# Altium PCB LKS_Motor_0313.PcbDoc
Units mil, origin at the board's own origin, x right, y up, seen from the top; angles counter-clockwise.
Board outline 4321.51 x 591.52 mil, 2 copper layers (Top Layer, Bottom Layer); 107 components, 74 nets, 326 pads, 0 vias.
Unrouted connection lines stored in the file: 165.
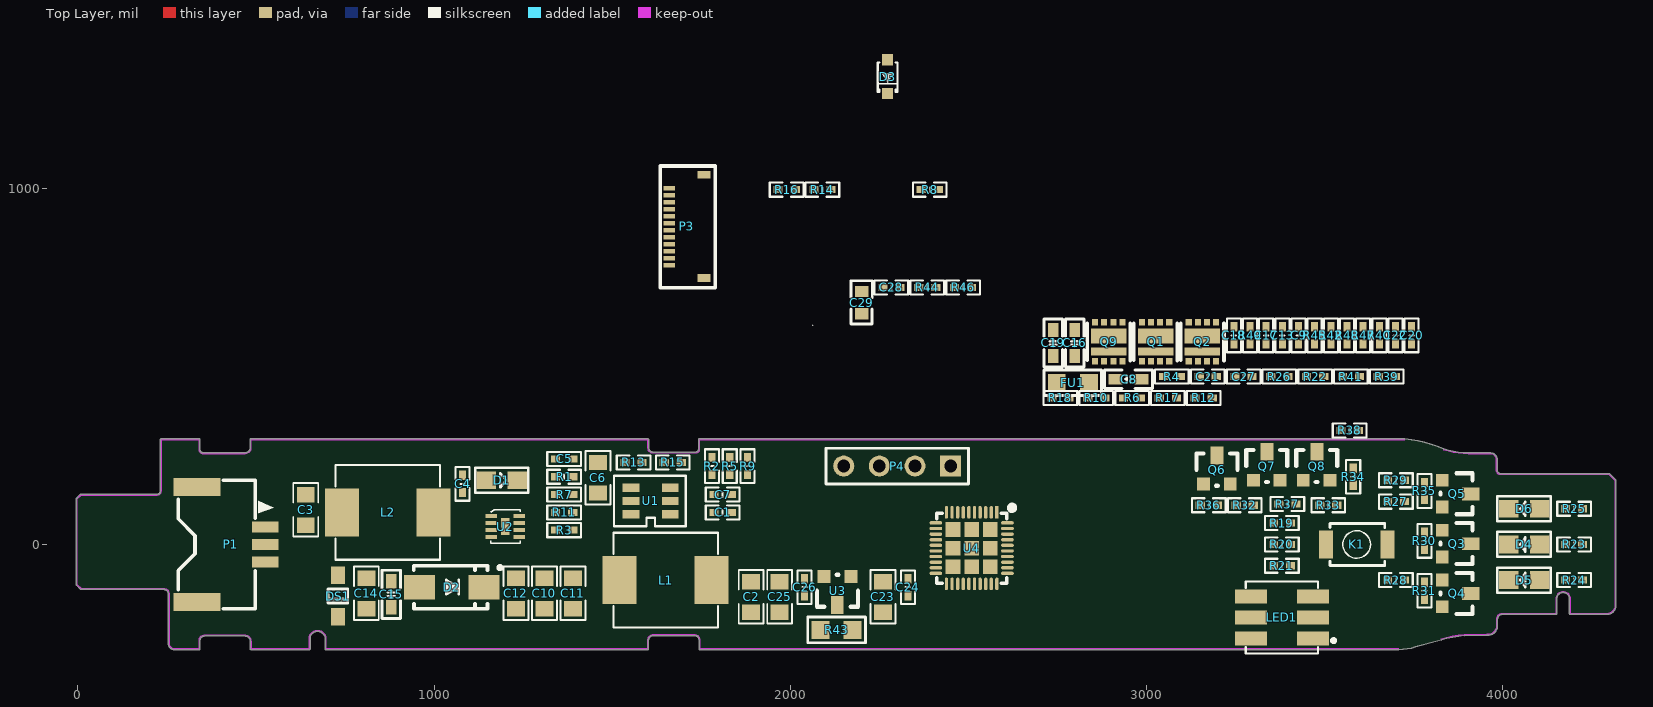
[diagram p0: Top Layer view]
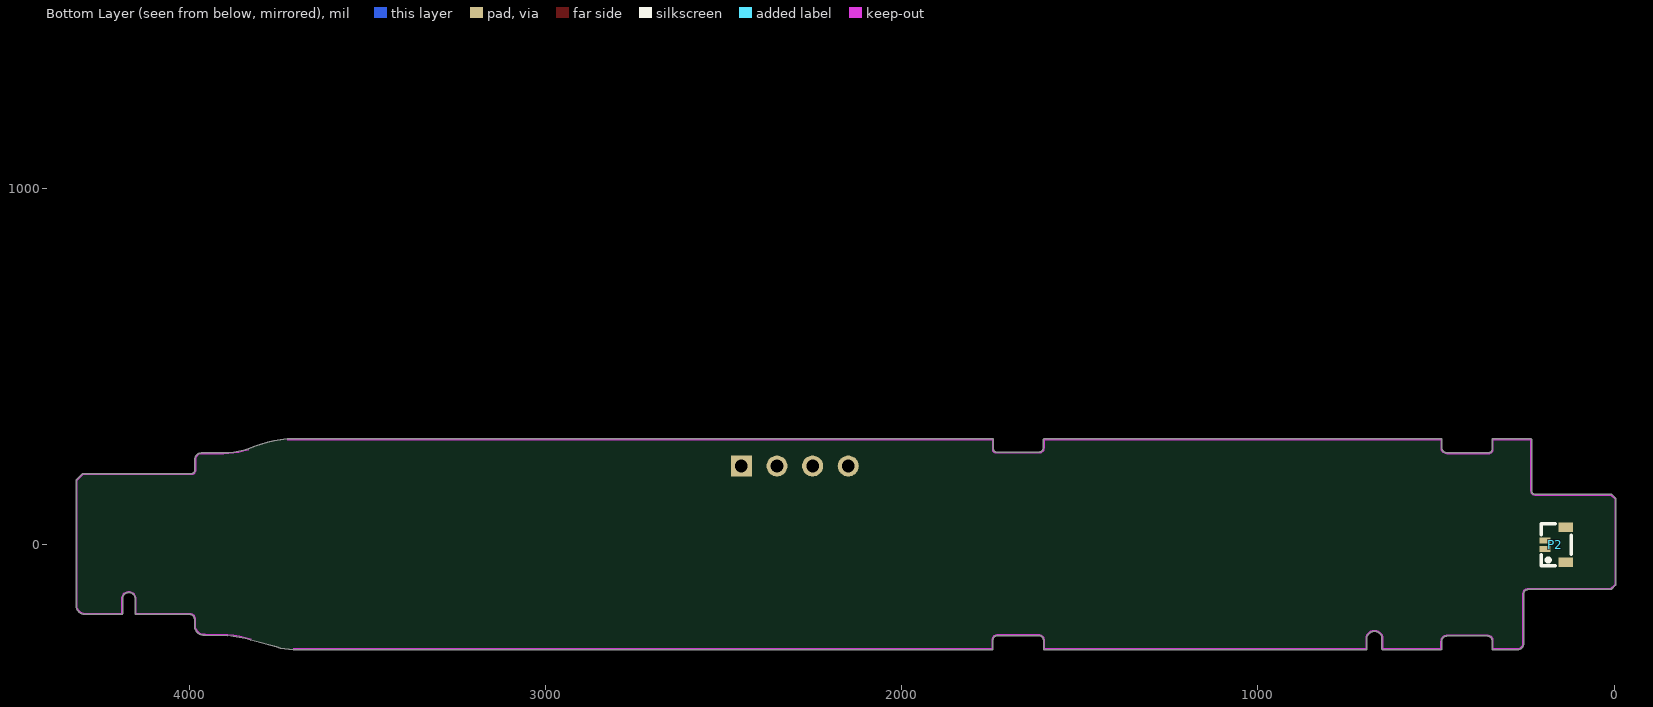
[diagram p1: Bottom Layer view, seen from below]

## Layer stack, top to bottom
Top Solder: solder mask 0.4, Solder Resist, Dk 3.5
Top Layer: signal copper 1.4
Dielectric1: core 12.6, FR-4, Dk 4.8
Bottom Layer: signal copper 1.4
Bottom Solder: solder mask 0.4, Solder Resist, Dk 3.5

## Board outline
340.79,-295.23 ccw(c340.79,-293.25) 342.78,-293.25 342.78,-270.05 cw(c355.82,-270.05) 355.82,-257.01 469.32,-257.01 cw(c469.32,-271.91) 484.23,-271.91 484.23,-293.25 ccw(c486.21,-293.25) 486.21,-295.23 649.96,-295.23 ccw(c649.96,-293.25) 651.94,-293.25 651.94,-259.1 cw(c672.98,-266.47) 694.02,-259.1 694.02,-293.25 ccw(c696,-293.25) 696,-295.23 1599.85,-295.23 ccw(c1599.85,-293.25) 1601.84,-293.25 1601.84,-269.29 cw(c1615.4,-269.32) 1615.37,-255.76 1730.9,-255.76 cw(c1730.9,-268.67) 1743.81,-268.67 1743.81,-293.3 ccw(c1745.79,-293.3) 1745.79,-295.29 3708.08,-295.29 ccw(c3708.08,-293.3) 3708.1,-295.29 ccw(c3706.34,-133.03) 3754.89,-287.86 3826.52,-268.29 ccw(c3826,-266.38) 3826.58,-268.27 cw(c3922.68,-590.85) 3892.14,-255.65 3955.05,-254.61 ccw(c3958.35,-227.78) 3985.04,-232.11 ccw(c3983.08,-231.79) 3985.06,-231.79 ccw(c3983.08,-231.79) 3985.06,-231.77 3985.06,-210.33 cw(c3999.33,-210.33) 3999.33,-196.07 4149.75,-196.07 ccw(c4149.75,-194.08) 4151.73,-194.08 4151.73,-148.89 cw(c4169.43,-153) 4187.14,-148.89 4187.14,-194.29 ccw(c4189.12,-194.29) 4189.12,-196.28 4293.89,-196.28 ccw(c4293.91,-194.29) 4294.1,-196.27 ccw(c4291.6,-169.92) 4317.01,-177.29 ccw(c4315.11,-176.74) 4317.09,-176.74 4317.09,180.13 ccw(c4315.11,180.13) 4316.5,181.55 4316.51,181.54 4300,198.05 4300.01,198.03 ccw(c4298.6,196.64) 4298.6,198.63 3994.41,198.63 cw(c3994.41,209.02) 3984.02,209.02 3984.02,238.48 ccw(c3965.86,238.48) 3965.86,256.65 3903.32,256.65 cw(c3910.73,520.73) 3833.14,268.19 ccw(c3692.04,-53.42) 3725.14,296.22 ccw(c3724.95,294.25) 3724.95,296.23 1744.96,296.23 ccw(c1744.96,294.25) 1742.97,294.25 1742.97,268.35 ccw(c1744.96,268.35) 1742.97,268.33 cw(c1733.77,268.35) 1733.79,259.15 cw(c1733.77,268.35) 1733.77,259.15 1614.77,259.15 cw(c1614.77,271.56) 1602.36,271.56 1602.36,294.14 ccw(c1600.38,294.14) 1600.38,296.13 485.79,296.13 ccw(c485.79,294.14) 483.81,294.14 483.81,271.08 cw(c469.79,271.08) 469.79,257.06 352.69,257.06 cw(c352.69,266.98) 342.78,266.98 342.78,294.25 ccw(c340.79,294.25) 340.79,296.23 233.92,296.23 ccw(c233.92,294.25) 231.94,294.25 231.94,150.5 cw(c221.84,150.5) 221.84,140.4 7.83,140.4 ccw(c7.83,138.41) 6.41,139.81 6.42,139.82 -3.84,129.56 -3.83,129.57 ccw(c-2.43,128.15) -4.42,128.15 -4.42,-112.73 ccw(c-2.43,-112.73) -3.84,-114.13 7.93,-125.9 ccw(c9.34,-124.5) 9.34,-126.48 241.97,-126.48 cw(c241.97,-138.74) 254.23,-138.74 254.23,-278.75 ccw(c270.72,-278.75) 270.72,-295.23

## Design rules (kind name [scope] priority, off if disabled: settings)
Clearance [(InPoly)] p1: gap=8 ignorepadtopadclearanceinfootprint=FALSE except(0: Arc-Hole Track-Hole SMDPad-Hole THPad-Hole Via-Hole Fill-Hole Poly-Hole Region-Hole Text-Hole)
ComponentClearance [All] p1 off: gap=10 collisioncheckmode=3 verticalgap=10 showdistances=FALSE
FabricationTestpoint [(IsPad And (OnTopLayer Or OnBottomLayer))] p1: side=3 testpointundercomponent=TRUE minsize=40 maxsize=100 preferedsize=60 minholesize=0 maxholesize=40 preferedholesize=32 testpointgrid=1 allowsidetop=TRUE allowsidebottom=TRUE usegrid=TRUE gridtolerance=0.01
HoleSize [All] p1: absolutevalues=TRUE maxlimit=200 minlimit=1 maxpercent=80.000 minpercent=20.000
HoleToHoleClearance [All] p1: gap=5 allowstackedmicrovias=TRUE
MinimumSolderMaskSliver [All] p1 off: minsoldermaskwidth=5
PlaneClearance [All] p1: clearance=7
PolygonConnect PolygonConnect_1 [IsPad] p1: connectstyle=Relief reliefconductorwidth=20 reliefentries=4 polygonreliefangle="90 Angle" airgapwidth=10
PolygonConnect [All] p2: connectstyle=Direct reliefconductorwidth=20 reliefentries=4 polygonreliefangle="90 Angle" airgapwidth=10
RoutingVias [All] p1: holewidth=18 width=30 viastyle="Through Hole" minholewidth=11.81 minwidth=19.68 maxholewidth=39.37 maxwidth=78.74
SilkToSilkClearance [All] p1 off: silktosilkclearance=5
SilkToSolderMaskClearance SilkscreenOverComponentPads [IsPad] p1 off: minsilkscreentomaskgap=5 clearancetoexposedcopper=TRUE
SolderMaskExpansion [All] p1: expansion=4 istentingtop=FALSE
Width [All] p1: maxlimit=100 minlimit=5 preferedwidth=8
22 further rules are at their usual default settings.

## Components (designator, comment, footprint, x,y, rotation, side; value= is the part's Value field where it differs from the comment)
C1 "1uF/16V" "C 0402_M" 1810,90 r180 top
C2 "10uF/16V" 0805C 1890,-150 r90 top
C3 "22uF/25V" 0805C 640,100 r270 top
C4 "1uF/25V" "C 0402_M" 1080,170 r90 top
C5 "103" "R 0402_M" 1365,240 r180 top
C6 "10uF/16V" 0805C 1460,190 r270 top
C7 "10pF/16V" "C 0402_M" 1810,140 r180 top
C8 "4.7uF/25V" "C 0603_M" 2949.5,464 r0 top
C9 "1nF" "C 0402_M" 3426.53,586.76 r90 top
C10 "22uF/25V" 0805C 1310,-140 r90 top
C11 "22uF/25V" 0805C 1390,-140 r90 top
C12 "22uF/25V" 0805C 1230,-140 r90 top
C13 "1nF" "C 0402_M" 3381.16,586.76 r90 top
C14 "22uF/25V" 0805C 810,-140 r90 top
C15 "1uF/25V" "C 0603_M" 880,-140 r90 top
C16 "4.7uF/25V" "C 0603_M" 2798,565.5 r90 top
C17 "1nF" "C 0402_M" 3335.79,586.76 r90 top
C18 "1nF" "C 0402_M" 3245.05,586.76 r90 top
C19 "4.7uF/25V" "C 0603_M" 2738,565.5 r90 top
C20 "1nF" "C 0402_M" 3744.12,586.76 r90 top
C21 "1nF" "C 0402_M" 3171.73,471.31 r0 top
C22 "NC" "C 0402_M" 3698.75,586.76 r90 top
C23 "10uF/10V" 0805C 2260,-150 r90 top
C24 "100nF" "C 0402_M" 2330,-120 r270 top
C25 "10uF/10V" 0805C 1970,-150 r90 top
C26 "100nF/10V" "C 0402_M" 2040,-120 r270 top
C27 "1nF/50V" "C 0402_M" 3272.22,471.31 r0 top
C28 "100nF/50V" "C 0402_M" 2283.93,721.31 r0 top
C29 "1uF/10V" 0603 2200.22,678.65 r90 top
D1 "LED_R" SMDLED 1190,180 r0 top
D2 "SS34" SMA 1050,-120 r0 top
D3 "4148" SOD-323 2273.07,1313.01 r90 top
D4 "LED_R" SMDLED 4060,0 r180 top
D5 "LED_R" SMDLED 4060,-100 r180 top
D6 "LED_R" SMDLED 4060,100 r180 top
DS1 "SMF12CA-MS" SOD-123F 730,-145 r90 top
FU1 "0.05R" "R 0805_M" 2793,454 r0 top
K1 "K1" Button3x4x2 3590,0 r180 top locked
L1 "6.8uH" 0630-10UH 1650,-100 r180 top
L2 "4.7uH" 0630-10UH 870,90 r0 top
LED1 "RGB5050" RGB-5050 3370,-210 r180 top
P1 "Header 3" X9827WRS-3P 430,5 r270 top locked
P2 "Header 2" CONN_SMD_2P_0.6 160,0 r90 bottom locked
P3 "Header 12" SMD-12 1660,1000 r270 top
P4 "Header 4" HDR1X4 2450,220 r180 top
Q1 "CJBM3020" DFN-3X3_8 2986.96,514.42 r0 top
Q2 "CJBM3020" DFN-3X3_8 3118.41,514.42 r0 top
Q3 "J3Y" SOT-23 3830,40 r270 top
Q4 "J3Y" SOT-23 3830,-100 r270 top
Q5 "J3Y" SOT-23 3830,180 r270 top
Q6 "J3Y" SOT-23 3160,170 r0 top
Q7 "J3Y" SOT-23 3300,180 r0 top
Q8 "J3Y" SOT-23 3440,180 r0 top
Q9 "CJBM3020" DFN-3X3_8 2855.5,514.42 r0 top
R1 "4.7K" "C 0402_M" 1365,190 r0 top
R2 "2.5M" "C 0402_M" 1780,220 r90 top
R3 "510" "R 0402_M" 1365,40 r0 top
R4 "10R" "R 0402_M" 3071.24,471.31 r0 top
R5 "340K" "C 0402_M" 1830,220 r90 top
R6 "10K" "R 0402_M" 2959.22,411.31 r0 top
R7 "RS/NC" "R 0402_M" 1365,140 r180 top
R8 "200K" "C 0402_M" 2391.66,995.77 r0 top
R9 "0" "C 0402_M" 1880,220 r90 top
R10 "10R" "R 0402_M" 2858.73,411.31 r0 top
R11 "RP/NC" "R 0402_M" 1365,90 r0 top
R12 "10K" "R 0402_M" 3160.2,411.31 r0 top
R13 "1.5M/NC" "C 0402_M" 1560,230 r0 top
R14 "1K" "C 0402_M" 2090.2,995.77 r0 top
R15 "100K" "C 0402_M" 1670,230 r180 top
R16 "100K" "C 0402_M" 1989.71,995.77 r0 top
R17 "10R" "R 0402_M" 3059.71,411.31 r0 top
R18 "10K" "R 0402_M" 2758.24,411.31 r0 top
R19 "1K" "C 0402_M" 3380,60 r0 top
R20 "1K" "C 0402_M" 3380,0 r0 top
R21 "1K" "C 0402_M" 3380,-60 r0 top
R22 "10R" "R 0402_M" 3473.2,471.31 r0 top
R23 "1K" "C 0402_M" 4200,0 r0 top
R24 "1K" "C 0402_M" 4200,-100 r0 top
R25 "1K" "C 0402_M" 4200,100 r0 top
R26 "10K" "R 0402_M" 3372.71,471.31 r0 top
R27 "10K" "C 0402_M" 3700,120 r0 top
R28 "10K" "C 0402_M" 3700,-100 r180 top
R29 "10K" "C 0402_M" 3700,180 r0 top
R30 "100K" "C 0402_M" 3780,10 r270 top
R31 "100K" "C 0402_M" 3780,-130 r270 top
R32 "10K" "C 0402_M" 3275.49,110 r180 top
R33 "10K" "C 0402_M" 3510,110 r180 top
R34 "10K" "C 0402_M" 3580,190 r90 top
R35 "100K" "C 0402_M" 3780,150 r270 top
R36 "100K" "C 0402_M" 3175,110 r180 top
R37 "100K" "C 0402_M" 3395.42,113.22 r0 top
R38 "100K" "C 0402_M" 3570,320 r180 top
R39 "10R" "R 0402_M" 3674.17,471.31 r0 top
R40 "10K" "R 0402_M" 3653.38,586.76 r90 top
R41 "10R" "R 0402_M" 3573.69,471.31 r0 top
R42 "10K" "R 0402_M" 3517.27,586.76 r90 top
R43 "0R/NC" "R 0805_M" 2130,-240 r0 top
R44 "2M" "C 0402_M" 2384.42,721.31 r0 top
R45 "1K1%" "R 0402_M" 3471.9,586.76 r90 top
R46 "470K" "C 0402_M" 2484.91,721.31 r0 top
R47 "1K1%" "R 0402_M" 3608.01,586.76 r90 top
R48 "1K" "R 0402_M" 3562.64,586.76 r90 top
R49 "10R" "R 0402_M" 3290.42,586.76 r90 top
U1 "CS5503R" SOT23-6L 1610,120 r180 top
U2 "CS5090EL" DFN2X2_8_0.5 1200,50 r270 top
U3 "CJ6376A33MY" SOT-23 2170,-90 r180 top
U4 "LKS32MC074DOF8Q8" QFN40 2510,-10 r270 top

## Footprints (in the part's own frame and the unit in brackets; to place one, negate y for a bottom-side part, rotate by r counter-clockwise, add the part's x,y. Pads: shape width x height; smd on the part's side, far side on the other; paste and mask are expansions set on the pad)
0603 [mm]
  rect 0.8x0.955 smd: 1(-0.795,0) 2(0.795,0)
  silkscreen extent -1.53,-0.75 1.56,0.75
0630-10UH [mm]
  rect 2.424x3.42 smd: 1(3.278,0) 2(-3.278,0)
  silkscreen extent -3.73,-3.38 3.73,3.38
0805C [mm]
  rect 1.1x1.27 smd: 1(-1.016,0) 2(1.159,0)
  silkscreen extent -1.83,-0.89 1.98,0.89
Button3x4x2 [mm]
  rect 1x2 smd: 1(-2.2,0) 2(2.2,0)
  silkscreen extent -2,-1.5 1.9,1.5
"C 0402_M" [mil] "无极性贴片电容"
  rect 26x20 smd: 1(-24,0) 2(24,0)
  silkscreen extent -47,-20 47,20, body extent -20,-10 20,10, height 21
"C 0603_M" [mil] "无极性贴片电容"
  rect 40x30 smd: 1(-36.5,0) 2(36.5,0)
  silkscreen extent -68,-26 68,26, body extent -31,-16 31,16, height 32
CONN_SMD_2P_0.6 [mm]
  rect 0.4x0.8 smd: 1(-0.324,0.871) 2(0.276,0.871)
  rect 0.7x1.05 smd: 3(1.226,-0.604) 4(-1.274,-0.604)
  silkscreen extent -1.52,-1.01 1.48,1.15
DFN2X2_8_0.5 [mm]
  rect 0.3x0.8 smd: 1(-0.75,-1) 2(-0.25,-1) 3(0.25,-1) 4(0.75,-1) 5(0.75,1) 6(0.25,1) 7(-0.25,1) 8(-0.75,1)
  rect 1.2x0.6 smd: 9(0,0)
  silkscreen extent -1.19,-1.02 1.2,1.08
DFN-3X3_8 [mil]
  rect 17x18 smd: 1(0,0) 2(25.59,0) 3(51.18,0) 4(76.77,0) 5(76.77,109.58) 6(51.18,109.58) 7(25.59,109.58) 8(0,109.58)
  rect 100x23 smd: 9(38.33,27.5)
  rect 100x42 smd: 10(38.33,70.83)
  silkscreen extent -22,2 99,106
HDR1X4 [mm] "Connector; Header; 4 Position"
  rect 1.5x1.5 hole 0.9: 1(0,0)
  round 1.5 hole 0.9: 2(2.54,0) 3(5.08,0) 4(7.62,0)
  silkscreen extent -1.27,-1.27 8.89,1.27
QFN40 [mm]
  rect 1.05x1.05 smd: 0(-1.32,-1.352) 0(-1.32,1.308) 0(-1.32,-0.022) 0(0.01,-0.022) 0(0.01,1.308) 0(0.01,-1.352) 0(1.34,-0.022) 0(1.34,-1.352) 0(1.34,1.308)
  rect 0.9x0.24 smd: 1(-2.54,1.778)
  oval 0.9x0.24 smd: 2(-2.54,1.378) 3(-2.54,0.978) 4(-2.54,0.578) 5(-2.54,0.178) 6(-2.54,-0.222) 7(-2.54,-0.622) 8(-2.54,-1.022) 9(-2.54,-1.422) 10(-2.54,-1.822) 21(2.56,-1.822) 22(2.56,-1.422) 23(2.56,-1.022) 24(2.56,-0.622) 25(2.56,-0.222) 26(2.56,0.178) 27(2.56,0.578) 28(2.56,0.978) 29(2.56,1.378) 30(2.56,1.778)
  oval 0.24x0.9 smd: 11(-1.79,-2.572) 12(-1.39,-2.572) 13(-0.99,-2.572) 14(-0.59,-2.572) 15(-0.19,-2.572) 16(0.21,-2.572) 17(0.61,-2.572) 18(1.01,-2.572) 19(1.41,-2.572) 20(1.81,-2.572) 31(1.81,2.528) 32(1.41,2.528) 33(1.01,2.528) 34(0.61,2.528) 35(0.21,2.528) 36(-0.19,2.528) 37(-0.59,2.528) 38(-0.99,2.528) 39(-1.39,2.528) 40(-1.79,2.528)
  silkscreen extent -2.98,-2.52 2.51,2.97
"R 0402_M" [mil] "1/16W贴片电阻"
  rect 26x20 smd: 1(-24,0) 2(24,0)
  silkscreen extent -47,-20 47,20, body extent -20,-10 20,10, height 12
"R 0805_M" [mil] "1/8W贴片电阻"
  rect 50x50 smd: 1(-45,0) 2(45,0)
  silkscreen extent -81,-36 81,36, body extent -39,-25 39,25, height 20
RGB-5050 [mm]
  rect 2.265x1 smd: 1(-2.462,1.373) 2(-2.462,-0.127) 3(-2.462,-1.627) 4(1.954,-1.627) 5(1.954,-0.127) 6(1.954,1.373)
  silkscreen extent -4.06,-2.7 2.32,2.45
SMA [mm] "4.5x2.6*2.2mm（长宽高，不包括引脚）"
  rect 2.2x1.75 smd: 1(-2.3,0) 2(2.3,0)
  silkscreen extent -2.71,-1.52 3.56,1.52, body extent -2.53,-1.3 2.58,1.3, height 2.15
SMD-12 [mil]
  rect 22x36 smd: 0(252.38,97.5) 0/2(-37.62,97.5)
  rect 13x32 smd: 1(216.53,0) 2(196.85,0) 3(177.17,0) 4(157.48,0) 5(137.79,0) 6(118.11,0) 7(98.42,0) 8(78.74,0) 9(59.05,0) 10(39.37,0) 11(19.69,0) 12(0,0)
  silkscreen extent -62,-25 279,130
SMDLED [mm]
  rect 1.4x1.27 smd: 1(-1.105,0) 2(1.105,0)
  silkscreen extent -1.91,-0.89 1.91,0.89
SOD-123F [mm]
  rect 1.25x1 smd: 1(1.475,0) 2(-1.475,0)
  silkscreen extent -0.5,-0.7 0.5,0.7, body extent -1.9,-0.85 1.85,0.85, height 1.2
SOD-323 [mm]
  rect 0.8x0.8 smd: 1(1.2,0) 2(-1.2,0)
  silkscreen extent -1.1,-0.7 1,0.7
SOT23-6L [mm]
  rect 1.2x0.6 smd: 1(-1.349,0.899) 2(-1.349,-0.051) 3(-1.349,-1.001) 4(1.451,-1.001) 5(1.451,-0.051) 6(1.451,0.899)
  silkscreen extent -2.45,-1.85 2.65,1.75
SOT-23 [mil]
  rect 36x36 smd: 1(0,0) 2(75,0)
  rect 36x50 smd: 3(38,80)
  silkscreen extent -20,-5 95,85
X9827WRS-3P [mm]
  rect 0.8x1.9 smd: 1(-1.123,2.438) 2(0.127,2.438) 3(1.377,2.438)
  rect 1.3x3.35 smd: 4(4.227,-2.438) 5(-3.973,-2.438)
  silkscreen extent -4.45,-3.76 4.7,3.04

## Part data
C1 C4 C24: library part CAP
C2 C3 C5 C6 C7 C8 C9 C10 C11 C12 C13 C14 C15 C16 C17 C18 C19 C20 C21 C22 C23 C25 C26: library part CAP, "Capacitor"
C27 C28 C29: library part C, "Capacitor"
D1 D4 D5 D6: library part LED
D2 D3: library part Diode, "Default Diode", PackageDocument=Sep-1996, Code_JEDEC=DO-214-AB, LatestRevisionDate=17-Jul-2002, LatestRevisionNote="Re-released for DXP Platform.", PackageReference=SMC, Published=8-Jun-2000, Publisher="Altium Limited"
DS1: library part DIODE-3, "12V/19.9V"
FU1 R4 R6 R10 R12 R17 R18 R22 R26 R39 R40 R41 R42 R45 R47 R48 R49: library part RAS
L1 L2: library part Inductor, "Inductor", Code_IEC=1005, Code_JEITA=0402, LatestRevisionDate=17-Jul-2002, LatestRevisionNote="Re-released for DXP Platform.", PackageReference=0402-A, Published=8-Jun-2000, Publisher="Altium Limited"
P1: "Header, 3-Pin", LatestRevisionDate=17-Jul-2002, LatestRevisionNote="Re-released for DXP Platform.", Publisher="Altium Limited"
P2: "Header, 2-Pin", LatestRevisionDate=17-Jul-2002, LatestRevisionNote="Re-released for DXP Platform.", Publisher="Altium Limited"
P3: "Header, 12-Pin", LatestRevisionDate=17-Jul-2002, LatestRevisionNote="Re-released for DXP Platform.", Publisher="Altium Limited"
P4: "Header, 4-Pin", LatestRevisionDate=17-Jul-2002, LatestRevisionNote="Re-released for DXP Platform.", Publisher="Altium Limited"
Q3 Q4 Q5 Q6 Q7 Q8: library part NPN, "NPN Transistor"
R1 R2 R3 R5 R7 R8 R9 R11 R13 R14 R15 R16 R19 R20 R21 R23 R24 R25 R27 R28 R29 R30 R31 R32 R33 R34 R35 R36 R37 R38 R43 R44 R46: library part RES2_S
U3: library part 78L15
U4: library part LKS32MC074DF8Q8, "芯片"
Q1 Q2 Q9: PCB DECAL=DFN-3X3_8

## Nets (pads, with @x,y where several pads share a name; then routed paths per layer and width w, separated by ;. In a path a pad name is that pad's centre, name@x,y a point inside that pad or via, vN(x,y) a via of type N, cw(c..) or ccw(c..) an arc to the next point about the centre after c; other vN are vias at no path point)
1ST: R29.2 U4.4
2ND: R27.2 U4.5
3.3V: C23.2 C24.1 P3.12 P4.1 R19.2 R20.2 R21.2 R23.2 R24.2 R25.2 R43.2 U3.1
3RD: R28.2 U4.6
BAT_ADC: R44.2 R46.1 U4.33
BLUE: R34.2 U4.9
BUTTON: K1.2 R13.2 R14.2 R15.2 R16.1 U1.4 U4.37
CH_STAT: C5.2 R1.1 U2.8 U4.38
DCDC_5V: C2.2 C7.2 C25.2 C26.1 L1.2 R2.1 R43.1 U3.2
DCDC_EN: D3.1 U4.36
GND: C1.1 C2.1 C3.1 C4.2 C5.1 C6.1 C10.1 C11.1 C12.1 C13.1 C14.1 C15.1 C18.1 C21.1 C23.1 C24.2 C25.1 C26.2 C28.2 C29.1 DS1.2 FU1.1 FU1.2 P1.3 P2.1 P3.7 P4.2 Q1.5 Q1.6 Q1.7 Q2.5 Q2.6 Q2.7 Q3.2 Q4.2 Q5.2 Q6.2 Q7.2 Q8.2 Q9.5 Q9.6 Q9.7 R3.2 R9.2 R11.2 R12.2 R15.1 R16.2 R26.2 R30.2 R31.2 R35.2 R36.2 R37.2 R38.2 R42.2 R45.1 R46.2 R47.1 R48.1 R49.1 U1.2 U2.2 U2.9 U3.3
GREEN: R32.2 U4.8
HO1: R39.2 U4.22
HO2: R17.2 U4.25
HO3: R4.2 U4.29
LH_OUT_0: P3.9 P3.11 U4.10 U4.11
LO1: R41.2 U4.20
LO2: R22.2 U4.19
LO3: R10.2 U4.18
NetC1_2: C1.2 U1.1
NetC3_2: C3.2 C4.1 D1.1 L2.2 P2.2 U2.1
NetC7_1: C7.1 R2.2 R5.1 U1.3
NetC9_2: C9.2 Q1.1 R4.1 R6.1
NetC10_2: C10.2 C11.2 C12.2 D2.2 U2.4
NetC13_2: C13.2 Q1.8 R10.1 R12.1
NetC17_2: C17.2 Q2.1 R17.1 R18.1
NetC18_2: C18.2 Q2.8 R22.1 R26.1
NetC20_2: C20.2 Q9.1 R39.1 R40.1
NetC21_2: C21.2 Q9.8 R41.1 R42.1
NetC27_1: C27.1 R49.2
NetC28_1: C28.1 U4.2
NetC29_2: C29.2 U4.3
NetD1_2: D1.2 R1.2
NetD2_1: D2.1 L2.1 U2.3
NetD3_2: D3.2 R14.1
NetD4_1: D4.1 R23.1
NetD4_2: D4.2 Q3.3
NetD5_1: D5.1 R24.1
NetD5_2: D5.2 Q4.3
NetD6_1: D6.1 R25.1
NetD6_2: D6.2 Q5.3
NetK1_1: K1.1 R8.1
NetL1_1: L1.1 U1.6
NetLED1_1: LED1.1 R21.1
NetLED1_2: LED1.2 R20.1
NetLED1_3: LED1.3 R19.1
NetLED1_4: LED1.4 Q6.3
NetLED1_5: LED1.5 Q7.3
NetLED1_6: LED1.6 Q8.3
NetP1_2: P1.2 R7.1
NetP3_8: P3.8 P3.10
NetQ3_1: Q3.1 R27.1 R30.1
NetQ4_1: Q4.1 R28.1 R31.1
NetQ5_1: Q5.1 R29.1 R35.1
NetQ6_1: Q6.1 R32.1 R36.1
NetQ7_1: Q7.1 R33.1 R37.1
NetQ8_1: Q8.1 R34.1 R38.1
NetR3_1: R3.1 U2.6
NetR5_2: R5.2 R9.1
NetR7_2: R7.2 R11.1 U2.7
OC: C27.2 R48.2 U4.39
OPA0_IN: C22.1 R47.2 U4.15
OPA0_IP: C22.2 R45.2 U4.14
RED: R33.2 U4.7
SWCLK: P4.4 U4.40
SWDIO: P4.3 U4.1
U: C19.1 C20.1 P3.1 P3.2 Q9.10 R40.2 U4.21
V: C16.1 C17.1 P3.3 P3.4 Q2.10 R18.2 U4.24
VB1: C19.2 U4.23
VB2: C16.2 U4.26
VB3: C8.2 U4.30
VBAT_8V4: C6.2 C14.2 C15.2 DS1.1 P1.1 R8.2 R13.1 R44.1 U1.5 U2.5
VDD: Q1.2 Q1.3 Q1.4 Q1.9 Q2.2 Q2.3 Q2.4 Q2.9 Q9.2 Q9.3 Q9.4 Q9.9 U4.27
VS3: C8.1 C9.1 P3.5 P3.6 Q1.10 R6.2 U4.28
pads on no net: P1.4 P1.5 P2.3 P2.4 P3.0 P3.0/2 U4.0 U4.12 U4.13 U4.16 U4.17 U4.31 U4.32 U4.34 U4.35

## Keep-outs
Keep-Out Layer:
  lines w3.94: 3708.08,-293.3 1745.79,-293.3 1745.79,-268.67 ccw(c1730.9,-268.67) 1730.9,-253.77 1615.37,-253.77 ccw(c1615.4,-269.32) 1599.85,-269.29 1599.85,-293.25 696,-293.25 696,-258.77 ccw(c672.98,-266.47) 649.96,-258.77 649.96,-293.25 486.21,-293.25 486.21,-271.91 ccw(c469.32,-271.91) 469.32,-255.02 355.82,-255.02 ccw(c355.82,-270.05) 340.79,-270.05 340.79,-293.25 270.72,-293.25 cw(c270.72,-278.75) 256.21,-278.75 256.21,-138.74 ccw(c241.97,-138.74) 241.97,-124.5 9.34,-124.5 -2.43,-112.73 -2.43,128.15 7.83,138.41 221.84,138.41 ccw(c221.84,150.5) 233.92,150.5 233.92,294.25 340.79,294.25 340.79,266.98 ccw(c352.69,266.98) 352.69,255.08 469.79,255.08 ccw(c469.79,271.08) 485.79,271.08 485.79,294.14 1600.38,294.14 1600.38,271.56 ccw(c1614.77,271.56) 1614.77,257.16 1733.77,257.16 ccw(c1733.77,268.35) 1744.96,268.35 1744.96,294.25 3724.95,294.25 ; 3826,-266.38 cw(c3922.68,-590.85) 3892.04,-253.67 3955.16,-252.63 ccw(c3958.35,-227.78) 3983.08,-231.79 3983.08,-210.33 cw(c3999.33,-210.33) 3999.33,-194.08 4149.75,-194.08 4149.75,-148.67 cw(c4169.43,-153) 4189.12,-148.67 4189.12,-194.29 4293.91,-194.29 ccw(c4291.6,-169.92) 4315.11,-176.74 4315.11,180.13 4298.6,196.64 3994.41,196.64 cw(c3994.41,209.02) 3982.04,209.02 3982.04,238.48 ccw(c3965.86,238.48) 3965.86,254.66 3903.29,254.66 cw(c3910.73,520.73) 3832.45,266.33

## Silkscreen, mask and mechanical layers (free items; w line width, h text height)
Top Overlay:
  lines w1.97: 2063.04,615.23 2064.22,616.01
Mechanical 15:
  lines w3.94: 4118,-307 4143,-282 4143,266
  lines w5: -92,0 1050,0 5295,0 ; 2813,-588 2813,552 ; 3590,-390 3590,310